# Altium PCB InstallGuide.PcbDoc
Units mil, origin at the board's own origin, x right, y up, seen from the top; angles counter-clockwise.
Board outline 1470 x 1410 mil, 2 copper layers (Top Layer, Bottom Layer); 14 components, 21 nets, 91 pads, 15 vias.
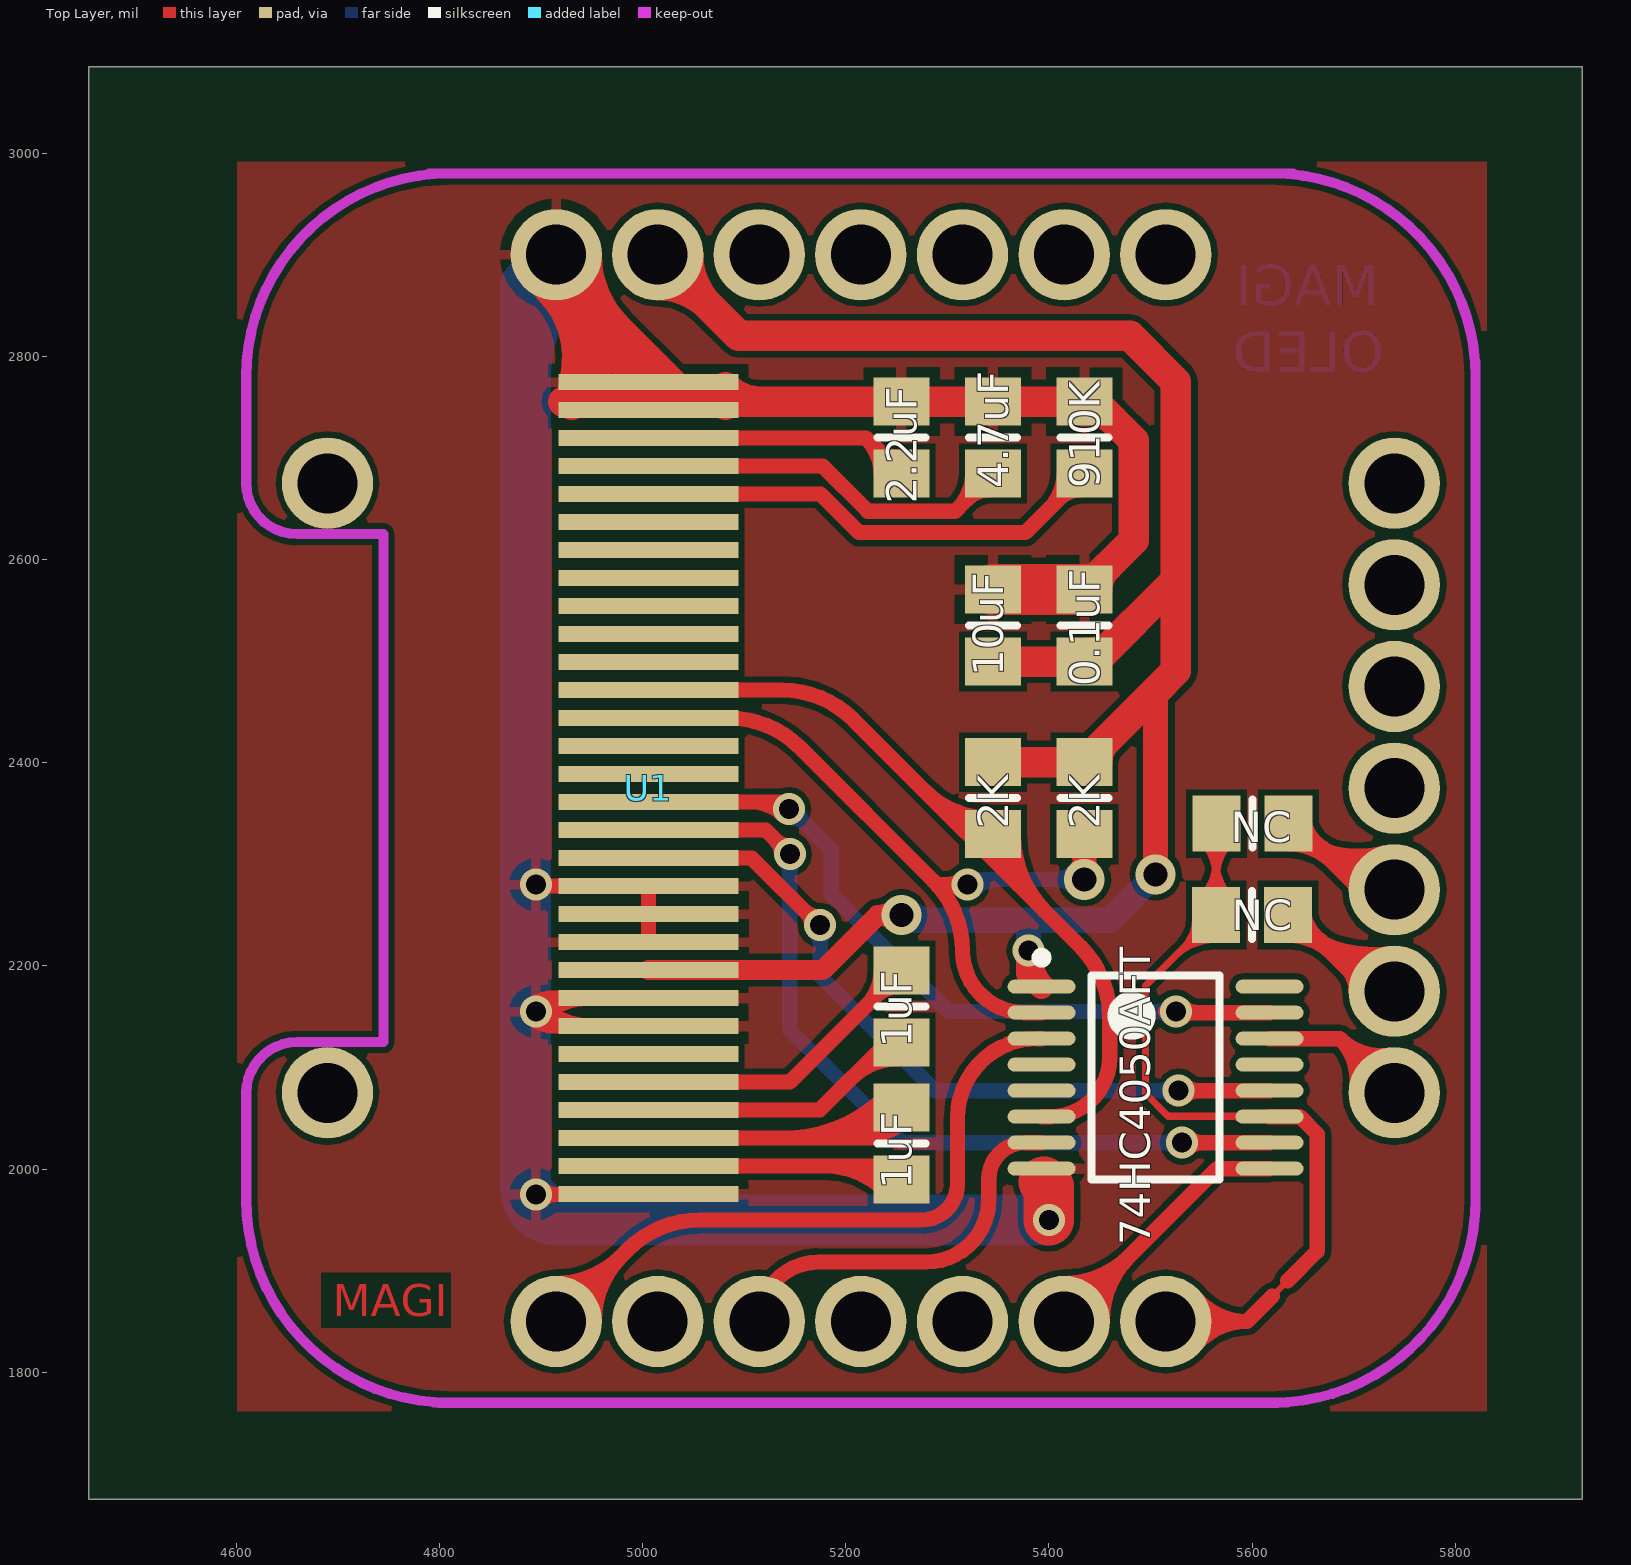
[diagram p0: Top Layer view]
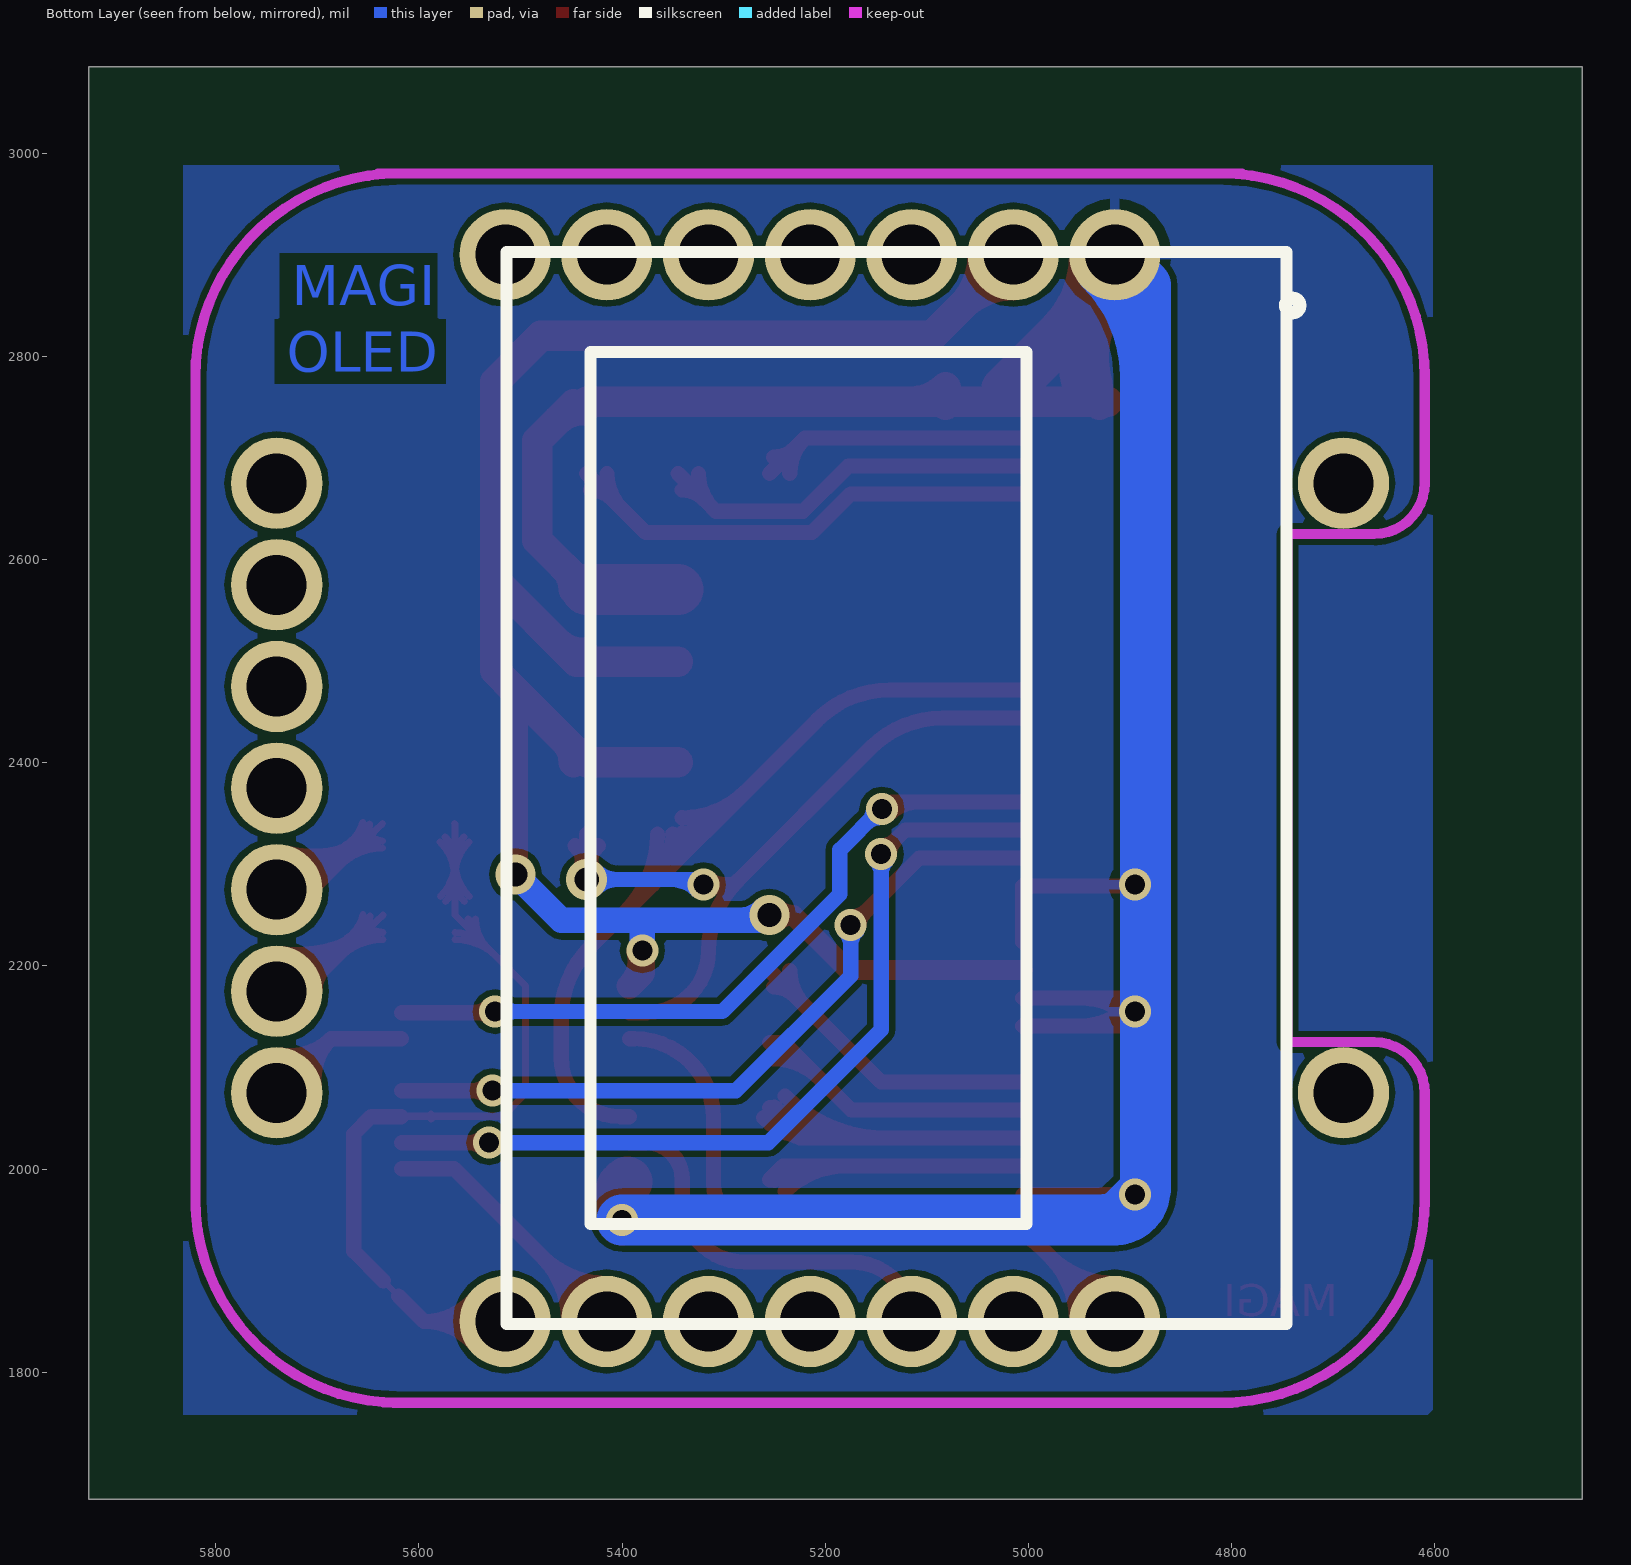
[diagram p1: Bottom Layer view, seen from below]

## Layer stack, top to bottom
Top Solder: solder mask 0.4, Solder Resist, Dk 3.5
Top Layer: signal copper 1.4
Dielectric 1: dielectric 12.6, FR-4, Dk 4.8
Bottom Layer: signal copper 1.4
Bottom Solder: solder mask 0.4, Solder Resist, Dk 3.5

## Board outline
5925,3085 5925,1675 4520,1675 4455,1675 4455,3085

## Design rules (kind name [scope] priority, off if disabled: settings)
Clearance [All] p1: gap=6
PolygonConnect [All] p1: connectstyle=Relief reliefconductorwidth=10 reliefentries=4 polygonreliefangle="90 Angle" airgapwidth=10
RoutingVias [All] p1: holewidth=28 width=50 viastyle="Through Hole" minholewidth=12 minwidth=24 maxholewidth=280 maxwidth=500
SolderMaskExpansion [All] p1: expansion=4
Width [All] p1: maxlimit=100 minlimit=6 preferedwidth=10
29 further rules are at their usual default settings.

## Components (designator, comment, footprint, x,y, rotation, side; value= is the part's Value field where it differs from the comment)
C1 "0805" 6-0805_N 5255,2025 r90 top
C2 "0805" 6-0805_N 5255,2160 r90 top
C3 "0805" 6-0805_N 5345,2535 r270 top
C4 "0805" 6-0805_N 5435,2535 r270 top
C5 "0805" 6-0805_N 5255,2720 r270 top
C6 "0805" 6-0805_N 5345,2720 r270 top
J1 "MAGI-M8" MAGI-M8 5215,2375 r180 bottom
R3 "RES1_1" 6-0805_n 5435,2720 r90 top
R4 "RES1_1" 6-0805_n 5435,2365 r90 top
R5 "RES1_1" 6-0805_n 5345,2365 r90 top
R6 "RES1_1" 6-0805_n 5600.43,2340 r180 top
R7 "RES1_1" 6-0805_n 5600,2250 r180 top
U1 "UG0.96" UG0.96 5065,2375 r90 bottom
U2 "74HC4050" TC74HC4050 5505,2090 r0 top

## Footprints (in the part's own frame and the unit in brackets; to place one, negate y for a bottom-side part, rotate by r counter-clockwise, add the part's x,y. Pads: shape width x height; smd on the part's side, far side on the other; paste and mask are expansions set on the pad)
6-0805_N [mm] "Chip Resistor, Body 2.0x1.2mm, IPC Medium Density"
  rect 1.2x1.4 smd: 1(-0.9,0) 2(0.9,0)
  silkscreen extent 0,-0.6 0,0.6, body extent -1.07,-0.7 1.07,0.7, height 0.7
6-0805_n [mm] "Chip Resistor, Body 2.0x1.2mm, IPC Medium Density"
  rect 1.2x1.4 smd: 1(-0.9,0) 2(0.9,0)
  silkscreen extent 0,-0.6 0,0.6, body extent -1.07,-0.7 1.07,0.7, height 0.7
MAGI-M8 [mil]
  round 90 hole 59.06: 1(300,525) 2(200,525) 3(100,525) 4(0,525) 5(-100,525) 6(-200,525) 7(-300,525) 8(-525,300) 9(-525,200) 10(-525,100) 11(-525,0) 12(-525,-100) 13(-525,-200) 14(-525,-300) 15(-300,-525) 16(-200,-525) 17(-100,-525) 18(0,-525) 19(100,-525) 20(200,-525) 21(300,-525) 22(525,-300) 28(525,300)
  Keep-Out Layer lines w10: 605,-405 cw(c405,-405) 405,-605 ; 605,405 ccw(c405,405) 405,605 ; 425,605 -425,605 ; 415,-605 -410,-605 ; -405,-605 cw(c-405,-405) -605,-405 ; -405,605 ccw(c-405,405) -605,405 ; -605,-415 -605,290 -605,420
  silkscreen extent 468,468 482,482
TC74HC4050 [mm]
  oval 1.7x0.35 smd: 1(-2.85,2.275) 2(-2.85,1.625) 3(-2.85,0.975) 4(-2.85,0.325) 5(-2.85,-0.325) 6(-2.85,-0.975) 7(-2.85,-1.625) 8(-2.85,-2.275) 9(2.85,-2.275) 10(2.85,-1.625) 11(2.85,-0.975) 12(2.85,-0.325) 13(2.85,0.325) 14(2.85,0.975) 15(2.85,1.625) 16(2.85,2.275)
  silkscreen extent -2.97,-2.55 1.6,3.12, body extent -2.25,-2.55 2.25,2.55, height 1.2
UG0.96 [mm]
  rect 0.4x4.5 smd far side: 1(-10.15,-1.5) 2(-9.45,-1.5) 3(-8.75,-1.5) 4(-8.05,-1.5) 5(-7.35,-1.5) 6(-6.65,-1.5) 7(-5.95,-1.5) 8(-5.25,-1.5) 9(-4.55,-1.5) 10(-3.85,-1.5) 11(-3.15,-1.5) 12(-2.45,-1.5) 13(-1.75,-1.5) 14(-1.05,-1.5) 15(-0.35,-1.5) 16(0.35,-1.5) 17(1.05,-1.5) 18(1.75,-1.5) 19(2.45,-1.5) 20(3.15,-1.5) 21(3.85,-1.5) 22(4.55,-1.5) 23(5.25,-1.5) 24(5.95,-1.5) 25(6.65,-1.5) 26(7.35,-1.5) 27(8.05,-1.5) 28(8.75,-1.5) 29(9.45,-1.5) 30(10.15,-1.5)
  silkscreen extent -13.4,-8.1 13.4,11.4

## Part data
C1 C2 C3 C4 C5 C6: library part CAP_1, "Capacitor"

## Via types
v1: diameter 31.5, hole 19.68, Top Layer to Bottom Layer, 12 vias
v2: diameter 39.37, hole 23.62, Top Layer to Bottom Layer, 2 vias
v3: diameter 40, hole 24, Top Layer to Bottom Layer, 1 vias

## Nets (pads, with @x,y where several pads share a name; then routed paths per layer and width w, separated by ;. In a path a pad name is that pad's centre, name@x,y a point inside that pad or via, vN(x,y) a via of type N, cw(c..) or ccw(c..) an arc to the next point about the centre after c; other vN are vias at no path point)
3.3V: C3.2 C4.2 J1.2 R4.2 R5.2 U1.9 U2.1 | length 2331.3
  Top Layer w15: U2.1@5392.59,2179.77 U2.1
  Top Layer w20: U1.9 5177.25,2195.87 5231.39,2250 v2(5255,2250) ; v2@5248.15,2243.15 ccw(c5231.62,2226.62) 5231.62,2250 ccw(c5231.62,2273.38) v2@5248.15,2256.85
  Top Layer w25: v1(5380,2215) 5380,2192.77 5392.8,2179.98 cw(c5418.52,2205.7) v1@5383.16,2214.24 ; v2(5505,2290) 5505,2470.43
  Top Layer w30: J1.2@5015,2870 cw(c5015,2797.57) 5066.21,2848.79 cw(c5117.43,2900) J1.2@5045,2900 ; J1.2 5095,2820 5480,2820 5525,2775 5525,2579.55 ; R5.2 R4.2 5505,2470.43 5525,2490.43 5525,2579.55 ; C3.2 C4.2 5445.01,2499.57 5525,2579.55 ; C4.2@5438.94,2508.19 ccw(c5438.94,2543.67) 5464.03,2518.58 ; R4.2@5447.56,2400.43 cw(c5477.88,2400.43) R4.2@5456.44,2421.87
  Bottom Layer w25: v2@5258.51,2244.78 5380,2244.78 ; v2@5260.08,2255.08 ccw(c5284.94,2279.94) 5284.94,2244.78 ; v1(5380,2215) 5380,2244.78 ; v2(5505,2290) 5459.78,2244.78 5380,2244.78
C1N: C2.2 U1.5 | length 355.7
  Top Layer w15: U1.5 5145.2,2085.63 C2.2 ; 5220.76,2161.19 ccw(c5186.51,2195.43) C2.2@5234.94,2195.43 ; 5230.26,2170.7 cw(c5251.06,2149.89) C2.2@5251.06,2179.31
C1P: C2.1 U1.4 | length 326.3
  Top Layer w15: U1.4 5174.46,2058.07 5240.95,2124.57 C2.1 ; 5206.28,2089.9 cw(c5251.06,2045.11) C2.1@5251.06,2108.45
C2N: C1.2 U1.3 | length 562.6
  Top Layer w15: U1.3 5225.08,2030.51 ; 5139.9,2030.51 ccw(c5139.9,2171.59) C1.2@5239.66,2071.83 ; 5176.12,2030.51 ccw(c5176.12,2135.38) C1.2@5250.27,2061.23 ; 5212.33,2030.51 ccw(c5212.33,2099.17) C1.2@5260.88,2050.62 ; 5230.26,2035.7 cw(c5251.06,2014.89) C1.2@5251.06,2044.31 ; C1.2@5235.03,2058.71 cw(c5200.57,2055.02) 5225.08,2030.51 ; C1.2 5225.08,2030.51
C2P: C1.1 U1.2 | length 359.1
  Top Layer w15: U1.2 5241.61,2002.95 C1.1 ; 5179.82,2002.95 cw(c5179.82,1918.33) C1.1@5239.66,1978.17 ; 5216.04,2002.95 cw(c5216.04,1954.54) C1.1@5250.27,1988.77
CS: J1.15 R6.2 R7.2 U2.11 | length 1351.3
  Top Layer w6: 5620,1875 5635,1890
  Top Layer w7: 5523.5,2208.93 cw(c5564.57,2167.86) R7.2@5564.57,2225.94 ; 5533,2218.43 ccw(c5505.37,2246.06) R7.2@5544.44,2246.06 ; 5535.45,2220.88 cw(c5564.57,2191.76) R7.2@5564.57,2232.94 ; R7.2@5544.95,2230.38 ccw(c5529.27,2246.06) R7.2@5551.44,2246.06 ; R7.2@5550.34,2268.17 ccw(c5515.99,2302.52) 5564.57,2302.52 ccw(c5613.15,2302.52) R7.2@5578.8,2268.17 ; R6.2@5550.77,2321.83 cw(c5517.47,2288.53) 5564.57,2288.53 ; R7.2@5555.29,2263.22 ccw(c5532.89,2285.62) 5564.57,2285.62 ccw(c5596.25,2285.62) R7.2@5573.85,2263.22 ; R6.2@5555.72,2326.78 cw(c5534.37,2305.43) 5564.57,2305.43 ; 5564.57,2286.44 cw(c5614.62,2286.44) R6.2@5579.23,2321.83 ; 5564.57,2303.34 cw(c5597.72,2303.34) R6.2@5574.28,2326.78 ; R6.2 5564.57,2339.57 R7.2 5495,2180.43 5495,2074.29 5517.34,2051.96 5616.86,2051.96 U2.11 ; 5581.62,2051.96 cw(c5581.62,2042.6) U2.11@5588.23,2049.22 ; 5583.27,2051.96 ccw(c5583.27,2058.97) U2.11@5588.23,2054.01
  Top Layer w15: J1.15 5595,1850 ; J1.15@5532.29,1835.61 cw(c5563,1810.06) 5563,1850 cw(c5563,1889.94) J1.15@5532.29,1864.39 ; J1.15@5543.82,1826.01 cw(c5595,1783.43) 5595,1850 ; J1.15@5543.82,1873.99 ccw(c5595,1916.57) 5595,1850 ; U2.11 5647.02,2051.61 5664.17,2034.47 5664.17,1919.17 5635,1890 ; 5620,1875 5595,1850
CS.3: U1.13 U2.12 | length 860.5
  Top Layer w15: U1.13 5107.53,2306.1 5173.64,2240 v1(5175,2240) ; 5158.59,2255.04 ccw(c5175,2271.45) v1@5175,2248.25 ; 5161.88,2251.75 cw(c5150.13,2240) v1@5166.75,2240 ; v1(5527.8,2077.2) U2.12 ; v1@5533.63,2071.37 cw(c5547.71,2057.29) 5547.71,2077.2 cw(c5547.71,2097.12) v1@5533.63,2083.04
  Bottom Layer w15: v1@5169.17,2234.17 cw(c5155.09,2220.09) 5175,2220.09 cw(c5194.91,2220.09) v1@5180.83,2234.17 ; v1(5175,2240) 5175,2190 5287.8,2077.2 v1(5527.8,2077.2) ; v1@5521.96,2071.37 ccw(c5507.88,2057.29) 5507.88,2077.2 ccw(c5507.88,2097.12) v1@5521.96,2083.04
D0: J1.21 U2.3 | length 872.2
  Top Layer w15: J1.21 4985.71,1920.71 cw(c5056.42,1850) 5056.42,1950 5275,1950 ccw(c5275,1985) 5310,1985 5310,2050 cw(c5388.39,2050) 5388.39,2128.39 U2.3 ; J1.21@4915,1872.5 ccw(c4915,1926.82) 4953.41,1888.41 ccw(c4991.82,1850) J1.21@4937.5,1850 ; J1.21@4915,1887.5 ccw(c4915,1978.03) 4979.02,1914.02 ccw(c5043.03,1850) J1.21@4952.5,1850
D0.3: R4.1 U1.18 U2.2 | length 1009.4
  Top Layer w15: U1.18 5084.68,2443.9 cw(c5084.68,2343.9) 5155.39,2414.61 5286.72,2283.28 cw(c5218.43,2215) 5286.79,2283.21 cw(c5218.43,2215) 5315,2215 ccw(c5376.02,2215) 5376.02,2153.98 U2.2 ; 5290,2280 v1(5320,2280) ; v1@5314.17,2274.17 ccw(c5300.09,2260.09) 5300.09,2280 ccw(c5300.09,2299.91) v1@5314.17,2285.83 ; R4.1@5423.6,2318.17 cw(c5396.08,2290.64) 5435,2290.64 cw(c5473.92,2290.65) R4.1@5446.4,2318.17 ; v3@5426.16,2293.84 ccw(c5404.82,2315.18) 5435,2315.18 ccw(c5465.18,2315.18) v3@5443.84,2293.84 ; v3@5426.53,2294.2 ccw(c5417.36,2304.16) 5430.44,2307.66 ccw(c5446.98,2312.09) v3@5440.06,2296.43 ; v3@5429.94,2296.43 ccw(c5423.02,2312.09) 5439.56,2307.66 ccw(c5452.64,2304.16) v3@5443.47,2294.2 ; v3@5435,2275 v3(5435,2285) R4.1
  Bottom Layer w15: v1(5320,2280) 5325,2285 v3(5435,2285) ; v1@5325.83,2274.17 cw(c5351.98,2248.02) 5351.98,2285 ; v3@5426.16,2276.16 ccw(c5404.82,2254.82) 5404.82,2285 ccw(c5404.82,2315.18) v3@5426.16,2293.84
D1: J1.19 U2.7 | length 386.9
  Top Layer w15: J1.19 cw(c5173.5,1850) 5173.5,1908.5 5279.33,1908.5 ccw(c5279.33,1970) 5314.66,1919.66 ccw(c5279.33,1970) 5329.67,1934.67 ccw(c5279.33,1970) 5340.83,1970 5340.83,1990 cw(c5376.85,1990) 5376.85,2026.02 U2.7
D1.3: R5.1 U1.19 U2.6 | length 1022
  Top Layer w15: U1.19 5137.12,2471.46 cw(c5137.12,2371.46) 5207.83,2442.17 5430.71,2219.29 cw(c5360,2148.58) 5460,2148.58 5460,2110 cw(c5401.61,2110) 5401.61,2051.61 U2.6 ; 5278.32,2371.68 ccw(c5341.06,2434.42) R5.1@5341.06,2345.69 ; 5303.93,2346.07 ccw(c5341.06,2383.2) R5.1@5341.06,2330.69 ; R5.1@5335.06,2329.57 ccw(c5370.37,2329.57) 5345.4,2304.6 ; R5.1@5350.06,2329.57 ccw(c5421.58,2329.57) 5371.01,2278.99 ; R5.1@5365.06,2329.57 ccw(c5472.8,2329.57) 5396.61,2253.39
D4: J1.12 R6.1 | length 1168.2
  Top Layer w7: R6.1@5635.87,2315.94 cw(c5635.87,2257.86) 5676.94,2298.93 ; R6.1@5635.87,2322.94 cw(c5635.87,2281.76) 5664.99,2310.88 ; R6.1@5638.23,2323.16 cw(c5643.25,2295.76) R6.1@5659.07,2318.68 ; R6.1@5638.88,2323.29 cw(c5646.52,2290.92) 5664.13,2319.13 ; R6.1@5639.49,2316.27 cw(c5647.55,2272.26) 5672.98,2309.08 ; R6.1@5640.49,2316.48 cw(c5651.95,2267.92) 5678.38,2310.24 ; R6.1@5641.24,2324.09 cw(c5652.19,2299.71) 5665.56,2322.86 ; R6.1@5644.11,2317.71 cw(c5659.1,2284.31) 5677.41,2316.01 ; R6.1@5644.43,2331.44 ccw(c5707.72,2394.73) J1.12@5731.02,2308.31 ; R6.1@5648.54,2339.46 ccw(c5667.9,2344.65) R6.1@5657.88,2327.29 ; R6.1@5648.65,2339.02 ccw(c5677.48,2345.68) 5661.81,2320.59 ; R6.1@5648.77,2338.43 ccw(c5683.7,2344.83) 5663.53,2315.6 ; R6.1@5648.99,2336.06 ccw(c5671.16,2336.06) R6.1@5655.48,2320.38 ; R6.1@5652.99,2322.88 ccw(c5711.35,2381.25) J1.12@5732.84,2301.55 ; R6.1@5655.3,2341.27 ccw(c5690.99,2350.83) 5672.52,2318.84 ; R6.1@5655.47,2340.6 ccw(c5700.77,2351.07) 5676.14,2311.63 ; R6.1@5655.66,2339.69 ccw(c5707.21,2349.13) 5677.44,2306 ; R6.1@5655.99,2336.06 ccw(c5695.06,2336.06) 5667.43,2308.43 ; 5661.54,2314.32 ccw(c5714.99,2367.77) J1.12@5734.66,2294.79 ; 5670.1,2305.77 ccw(c5718.62,2354.29) J1.12@5736.49,2288.03 ; 5678.66,2297.21 ccw(c5722.26,2340.81) J1.12@5738.31,2281.28 ; 5687.22,2288.65 ccw(c5725.89,2327.33) J1.12@5740.13,2274.52 ; J1.12@5729.2,2315.07 cw(c5704.08,2408.21) R6.1 5700.87,2275 J1.12
D5: J1.13 R7.1 | length 1193.5
  Top Layer w7: R7.1@5635.43,2225.94 cw(c5635.43,2167.86) 5676.5,2208.93 ; R7.1@5635.43,2232.94 cw(c5635.43,2191.76) 5664.55,2220.88 ; R7.1@5637.18,2233.06 cw(c5641.1,2203.91) R7.1@5658.94,2227.29 ; R7.1@5637.79,2233.15 cw(c5643.9,2199.71) 5663.23,2227.68 ; R7.1@5638.11,2226.12 cw(c5644.28,2180.22) 5672.38,2217.04 ; R7.1@5639.05,2226.27 cw(c5648.19,2176.2) 5677.13,2218.07 ; R7.1@5639.95,2233.74 cw(c5649.75,2207) 5665.12,2230.99 ; R7.1@5642.36,2227.17 cw(c5655.85,2190.37) 5677,2223.38 ; R7.1@5645.51,2239.93 ccw(c5721.79,2316.2) J1.13@5735.59,2209.22 ; R7.1@5648.25,2248.87 ccw(c5668.14,2253.23) R7.1@5657.16,2236.08 ; R7.1@5648.34,2248.42 ccw(c5677.22,2253.69) 5660.53,2229.54 ; R7.1@5648.44,2247.81 ccw(c5682.08,2252.33) 5661.49,2225.35 ; R7.1@5648.55,2246.06 ccw(c5670.73,2246.06) R7.1@5655.05,2230.38 ; R7.1@5655.09,2250.37 ccw(c5691.49,2258.35) 5671.39,2226.97 ; R7.1@5655.23,2249.68 ccw(c5700.73,2257.99) 5674.43,2219.93 ; R7.1@5655.38,2248.74 ccw(c5705.77,2255.51) 5674.92,2215.09 ; R7.1@5655.56,2246.06 ccw(c5694.63,2246.06) 5667,2218.43 ; R7.1@5655.58,2229.86 ccw(c5724.09,2298.37) J1.13@5736.48,2202.27 ; 5665.65,2219.79 ccw(c5726.39,2280.53) J1.13@5737.38,2195.33 ; 5675.72,2209.71 ccw(c5728.69,2262.69) J1.13@5738.27,2188.39 ; 5685.79,2199.64 ccw(c5730.99,2244.85) J1.13@5739.17,2181.45 ; 5690.06,2195.37 cw(c5669.69,2175) J1.13@5698.5,2175 ; 5695.86,2189.57 ccw(c5733.29,2227.01) J1.13@5740.06,2174.5 ; J1.13@5734.69,2216.16 cw(c5719.48,2334.04) R7.1 5710.43,2175 J1.13
DC: J1.14 U2.14 | length 313.8
  Top Layer w15: U2.14 5686.61,2128.39 ; J1.14@5702.85,2080.11 ccw(c5646.14,2087.91) 5686.62,2128.38 ; J1.14@5717.71,2078.06 ccw(c5683.68,2082.74) 5707.97,2107.03 ccw(c5732.26,2131.32) J1.14@5736.94,2097.29 ; J1.14@5734.89,2112.15 cw(c5727.09,2168.86) 5686.62,2128.38 ; J1.14 5686.61,2128.39
DC.3: U1.15 U2.15 | length 870.6
  Top Layer w15: U1.15 5135.14,2361.22 5142.01,2354.35 v1(5144.28,2354.35) ; 5107.79,2361.22 cw(c5107.79,2317.86) v1@5138.45,2348.52 ; v1(5525,2155) 5515,2155 5516.02,2153.98 U2.15 ; v1@5530.83,2149.17 cw(c5542.44,2137.56) 5542.44,2153.98 ; v1@5530.83,2160.83 ccw(c5547.38,2177.38) 5547.38,2153.98
  Bottom Layer w15: v1@5144.28,2346.11 cw(c5144.28,2322.9) 5160.69,2339.31 ; v1(5144.28,2354.35) 5145.65,2354.35 5185.75,2314.25 5185.75,2270.61 5301.36,2155 v1(5525,2155) ; v1@5152.53,2354.35 ccw(c5169.15,2354.35) 5157.4,2342.6 ; v1@5519.17,2149.17 ccw(c5505.09,2135.09) 5505.09,2155 ccw(c5505.09,2174.91) v1@5519.17,2160.83
GND: C3.1 C4.1 C5.1 C6.1 J1.1 R3.2 U1.1 U1.7 U1.8 U1.10 U1.11 U1.12 U1.29 U1.30 U2.8 | length 3702.1
  Top Layer w15: v1@4890.23,2150.23 ccw(c4913.11,2173.11) 4913.11,2140.75 ; v1@4890.23,2159.77 cw(c4910.83,2139.17) 4910.83,2168.31 ; v1(4895,1975) U1.1@5005.55,1975 ; v1(4895,2280) 4896.46,2278.54 U1.12 U1.11 U1.10 ; v1@4900.83,1969.17 cw(c4914.91,1955.09) 4914.91,1975 cw(c4914.91,1994.91) v1@4900.83,1980.83 ; v1@4900.83,2149.17 cw(c4947.04,2102.96) U1.8@4947.04,2168.31 ; v1@4900.83,2160.83 ccw(c4949.32,2209.32) U1.7@4949.32,2140.75 ; U1.7 4909.25,2140.75 v1(4895,2155) 4908.31,2168.31 U1.8
  Top Layer w30: 4922.19,2755.43 cw(c4922.19,2744.01) U1.29@4930.28,2752.09 ; 4930,2760 4934.57,2755.43 C5.1 R3.2 ; U1.29@5081.61,2752.09 cw(c5089.69,2744.01) 5089.69,2755.43 ; U1.30@5081.61,2769.57 ccw(c5115.74,2803.69) 5115.74,2755.43 ; C4.1 5483.56,2618.99 5483.56,2716.89 R3.2@5447.72,2752.72 ; R3.2@5438.94,2746.81 cw(c5438.94,2711.33) 5464.03,2736.42 ; C4.1@5447.56,2570.43 cw(c5477.88,2570.43) C4.1@5456.44,2591.87
  Top Layer w50: J1.1 J1.1@4915,2873.36 ; J1.1@4935,2900 ccw(c5047.59,2900) 4967.98,2820.38 ; U1.30@4941.69,2769.86 ccw(c4840.63,2798.99) J1.1@4915,2873.36 ; 5021.68,2766.68 J1.1@4915,2873.36 ; C3.1 C4.1 ; 5395,1987.52 5400,1982.52 v1(5400,1950)
  Bottom Layer w50: 4885,2779.29 cw(c5035.71,2779.29) J1.1@4929.14,2885.86 ; v1@4886.01,1972.83 ccw(c4915,1979.83) 4915,1950 ; v1@4888.46,1968.46 ccw(c4933.02,2013.02) 4933.02,1950 ; J1.1 4885,2870 4885,1980 4915,1950 ; v1(5400,1950) 4915,1950
IREF: R3.1 U1.26 | length 530
  Top Layer w15: U1.26 5175.23,2664.37 5213.15,2626.44 5376.88,2626.44 R3.1 ; 5400.76,2650.32 ccw(c5366.51,2684.57) R3.1@5414.94,2684.57 ; 5410.26,2659.83 cw(c5431.06,2639.03) R3.1@5431.06,2668.44
RES: J1.16 U2.9 | length 492.1
  Top Layer w15: J1.16 5565.43,2000.43 U2.9 ; J1.16@5415,1872.5 ccw(c5415,1926.82) 5453.41,1888.41 ccw(c5491.82,1850) J1.16@5437.5,1850 ; J1.16@5415,1887.5 ccw(c5415,1978.03) 5479.02,1914.02 ccw(c5543.03,1850) J1.16@5452.5,1850
RES.3: U1.14 U2.10 | length 965.1
  Top Layer w15: U1.14 5121.34,2333.66 v1(5145,2310) ; v1@5136.75,2310 ccw(c5116.84,2310) 5130.92,2324.08 ccw(c5145,2338.16) v1@5145,2318.25 ; v1(5531.02,2026.02) U2.10 ; v1@5536.86,2020.19 cw(c5550.94,2006.11) 5550.94,2026.02 cw(c5550.94,2045.94) v1@5536.86,2031.86
  Bottom Layer w15: v1@5139.17,2304.17 cw(c5125.09,2290.09) 5145,2290.09 cw(c5164.91,2290.09) v1@5150.83,2304.17 ; v1(5145,2310) 5145,2137.05 5256.02,2026.02 v1(5531.02,2026.02) ; v1@5525.19,2020.19 ccw(c5511.11,2006.11) 5511.11,2026.02 ccw(c5511.11,2045.94) v1@5525.19,2031.86
VCC: C5.2 U1.28 | length 324.7
  Top Layer w15: U1.28 5220.08,2719.49 C5.2 ; 5220.76,2718.81 cw(c5186.51,2684.57) C5.2@5234.94,2684.57 ; 5230.26,2709.3 ccw(c5251.06,2730.11) C5.2@5251.06,2700.69
VCOMH: C6.2 U1.27 | length 434
  Top Layer w15: U1.27 5177.36,2691.93 5221.85,2647.44 5307.88,2647.44 C6.2 ; 5310.76,2650.32 ccw(c5276.51,2684.57) C6.2@5324.94,2684.57 ; 5320.26,2659.83 cw(c5341.06,2639.03) C6.2@5341.06,2668.44
pads on no net: J1.3 J1.4 J1.5 J1.6 J1.7 J1.8 J1.9 J1.10 J1.11 J1.17 J1.18 J1.20 J1.22 J1.28 U1.6 U1.16 U1.17 U1.20 U1.21 U1.22 U1.23 U1.24 U1.25 U2.4 U2.5 U2.13 U2.16

## Polygon pours and split planes (outlines as drawn)
GND on Top Layer "Bottom Layer-No Net" (solid, pour order 4): 5831.24,2991.45 4601.24,2991.45 4601.24,1761.45 5831.24,1761.45
GND on Bottom Layer "Bottom Layer-No Net" (solid, pour order 2): 5832.04,2988.03 4602.04,2988.03 4602.04,1763.03 4607.04,1758.03 5832.04,1758.03

## Keep-outs
Keep-Out Layer:
  lines w10: 4610,1970 4610,2075 cw(c4660,2075) 4660,2125 4690,2125 4745,2125 4745,2625 4695,2625 4660,2625 cw(c4660,2675) 4610,2675 4610,2780

## Other copper
Bottom Layer:
  text "MAGI" at 5725,2850 h39.37
  text "OLED" at 5730,2785 h39.37

## Silkscreen, mask and mechanical layers (free items; w line width, h text height)
Top Overlay:
  text "4.7uF" at 5360,2670 h30 r90
  text "910K" at 5450,2670 h30 r90
  text "2.2uF" at 5270,2655 h30 r90
  text "10uF" at 5355,2485 h30 r90
  text "0.1uF" at 5450,2475 h30 r90
  text "2K" at 5360,2335 h30 r90
  text "2K" at 5450,2335 h30 r90
  text "NC" at 5579.23,2321.83 h30
  text "NC" at 5580,2235 h30
  text "1uF" at 5264.92,2119.55 h30 r90
  text "1uF" at 5265,1980 h30 r90
  text "74HC4050AFT" at 5500,1925 h30 r90
Top Solder:
  lines w15: 5620,1875 5635,1890

## Text inside footprints (layer, text, board x,y; h text height)
J1: Top Layer "MAGI" at 4695,1855 h31.5